# Altium PCB PCB1.PcbDoc
Units mil, origin at the board's own origin, x right, y up, seen from the top; angles counter-clockwise.
Board outline 3510 x 3510 mil, 2 copper layers (Top Layer, Bottom Layer); 36 components, 58 nets, 185 pads, 40 vias.
Unrouted connection lines stored in the file: 34.
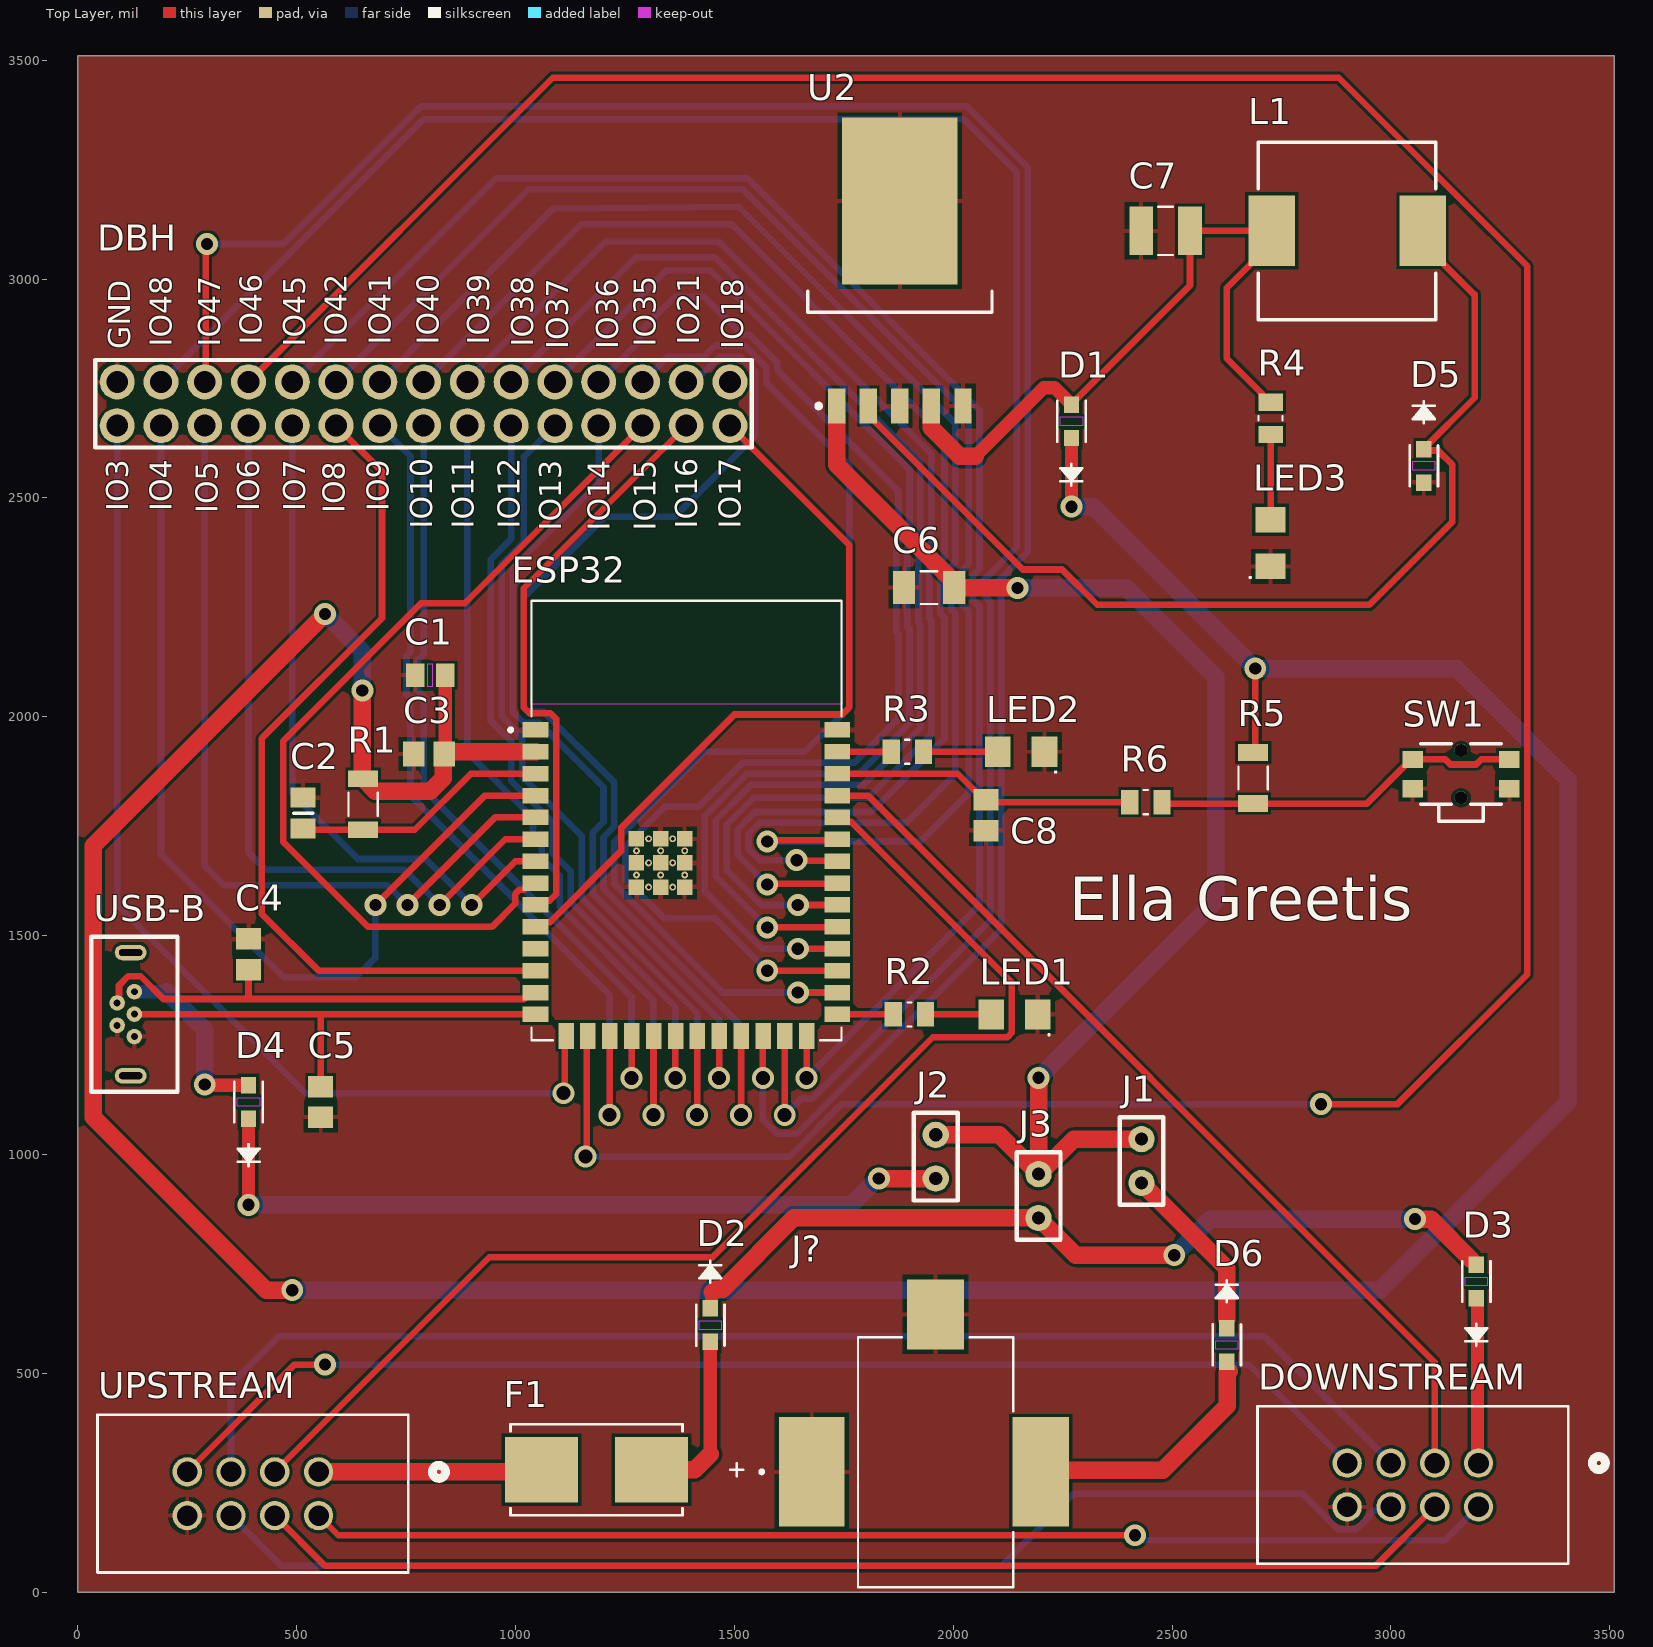
[diagram p0: Top Layer view]
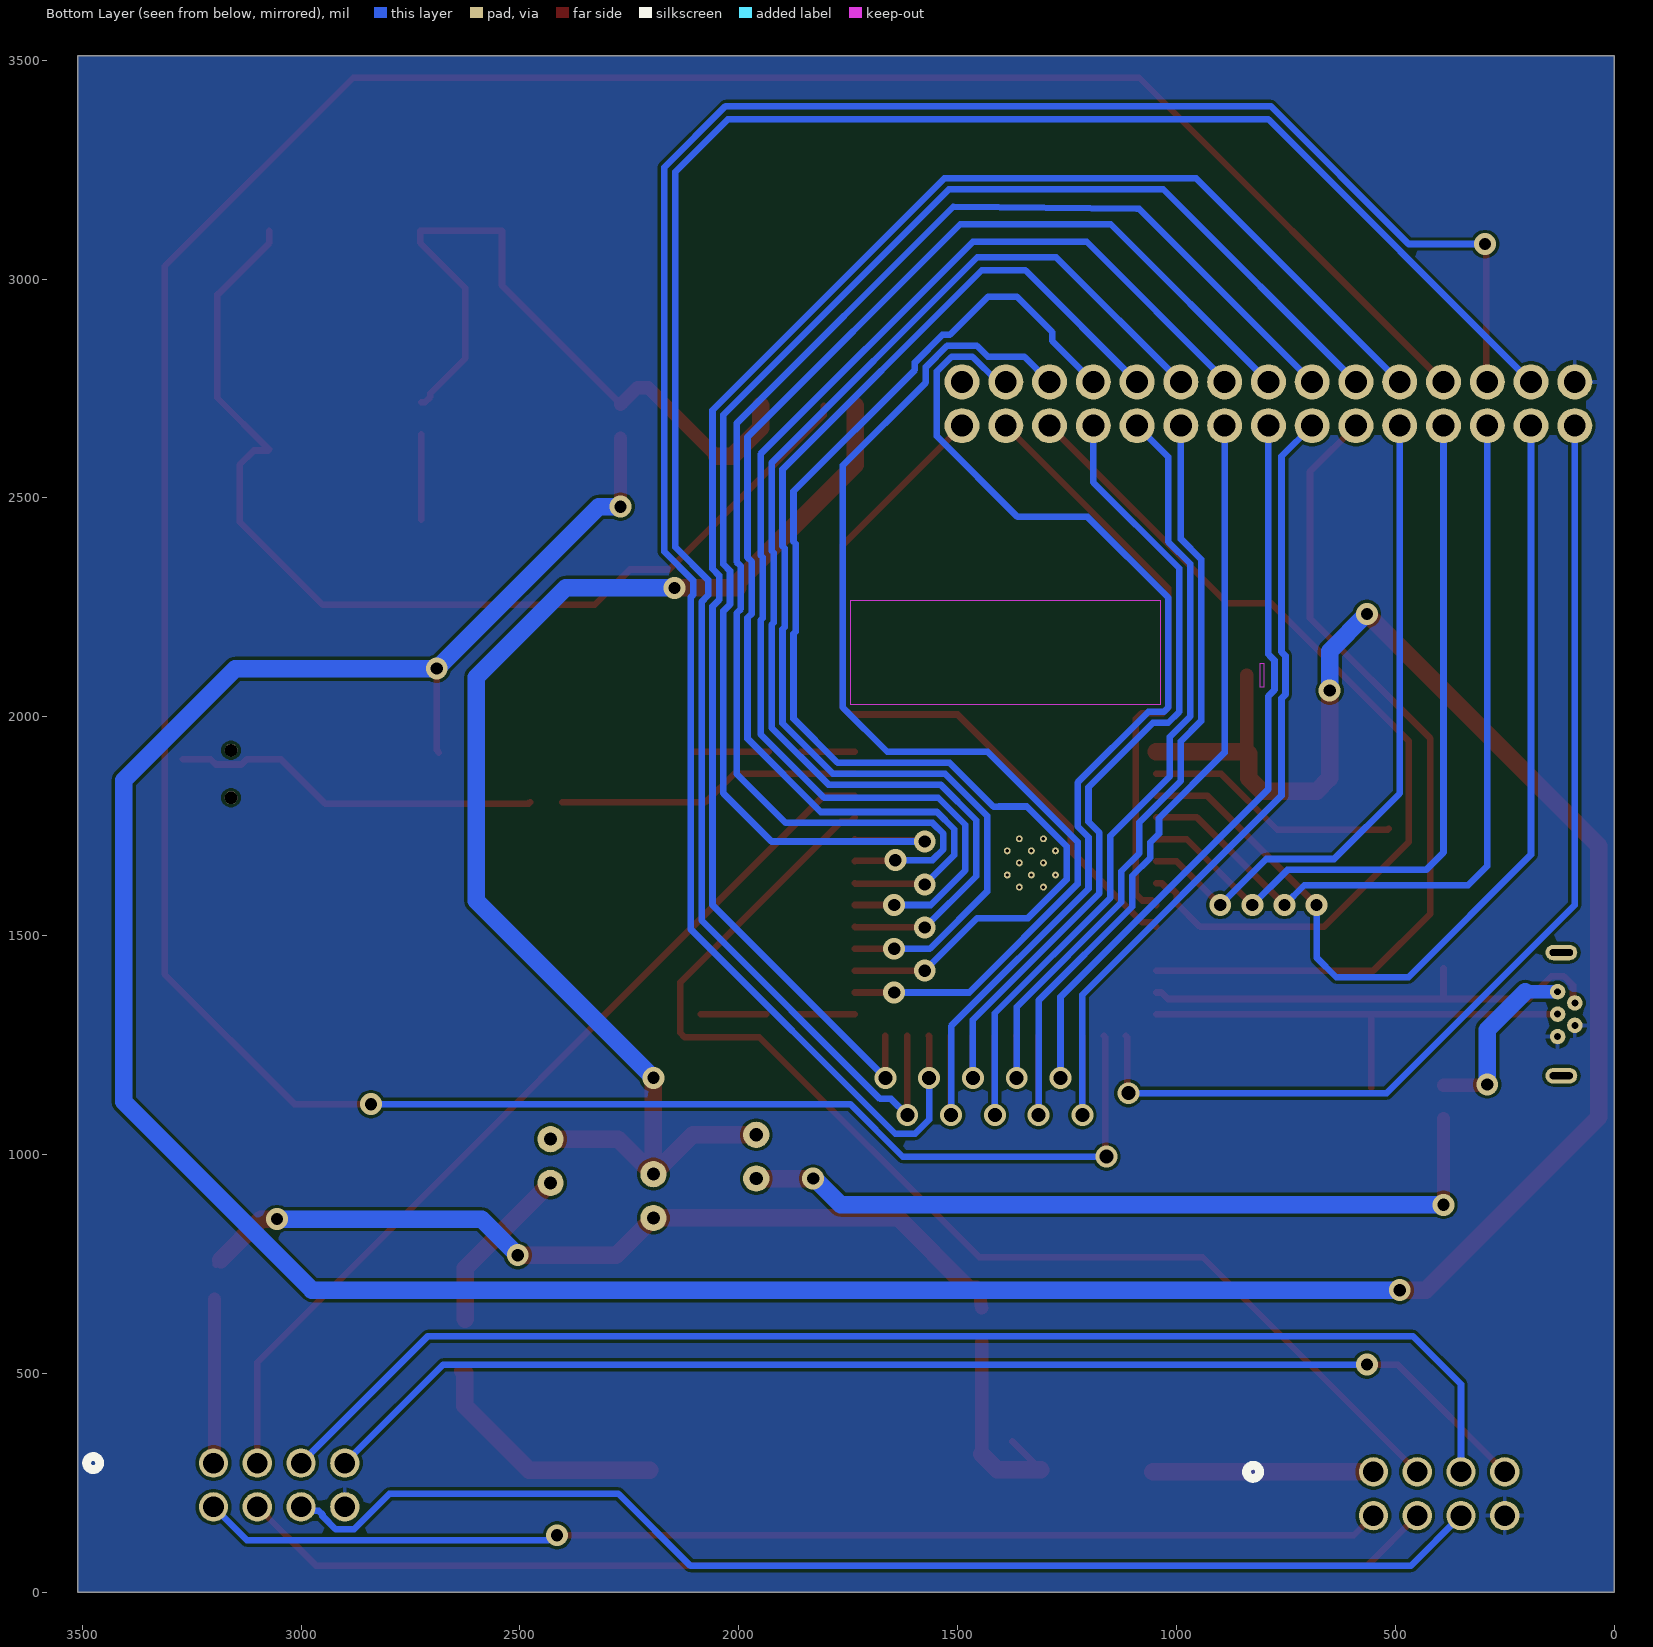
[diagram p1: Bottom Layer view, seen from below]

## Layer stack, top to bottom
Top Solder: solder mask 0.4, Solder Resist, Dk 3.5
Top Layer: signal copper 1.4
Dielectric 1: dielectric 12.6, FR-4, Dk 4.8
Bottom Layer: signal copper 1.4
Bottom Solder: solder mask 0.4, Solder Resist, Dk 3.5

## Board outline
0,0 0,3510 3510,3510 3510,0

## Design rules (kind name [scope] priority, off if disabled: settings)
Clearance [All] p1: gap=7 ignorepadtopadclearanceinfootprint=FALSE
ComponentClearance [All] p1: gap=7 collisioncheckmode=3 verticalgap=10 showdistances=FALSE
DiffPairsRouting [All] p1: maxlimit=15 minlimit=10 mostfreqgap=15 toplayer_minwidth=15 toplayer_maxwidth=15 toplayer_prefwidth=15 bottomlayer_minwidth=15 bottomlayer_maxwidth=15 bottomlayer_prefwidth=15 maxuncoupledlength=500
HoleSize [All] p1: absolutevalues=TRUE maxlimit=100 minlimit=32 maxpercent=80.000 minpercent=20.000
PolygonConnect [All] p1: connectstyle=Relief reliefconductorwidth=10 reliefentries=4 polygonreliefangle="90 Angle" airgapwidth=10
RoutingVias [All] p1: holewidth=35 width=57 viastyle="Through Hole" minholewidth=32 minwidth=54 maxholewidth=79 maxwidth=101
SilkToSolderMaskClearance [IsPad] p1: minsilkscreentomaskgap=8 clearancetoexposedcopper=TRUE
SolderMaskExpansion [All] p1: expansion=4 istentingtop=FALSE
SupplyNets "Schematic Supply Nets" [InNet('GND')] p1: voltage=0.000
Width [All] p1: maxlimit=50 minlimit=15 preferedwidth=15 minimp=50.000000 maximp=50.000000 favimp=50.000000
26 further rules are at their usual default settings.

## Classes and differential pairs
differential pair D: +D_P -D_N

## Components (designator, comment, footprint, x,y, rotation, side; value= is the part's Value field where it differs from the comment)
C1 "CL21A226MAYNNNE" CAP_CL_21_SAM 805,2095 r0 top value="22 uF"
C2 "CL21B105KBFNNNE" CAPC2012X140N 515,1780 r90 top value="1 uF"
C3 "THISONE08053C104KAT2A" CAPC2012X06N 802.52,1915 r0 top value="0.1 uF"
C4 "THISONE08053C104KAT2A" CAPC2012X06N 390,1457.48 r90 top value="0.1 uF"
C5 "THISONE08053C104KAT2A" CAPC2012X06N 555,1120 r270 top value="0.1 uF"
C6 "GRM31CR61A107MEA8L" CAPC3216X190N 1945,2295 r0 top value="100 uF"
C7 "JMK325ABJ337MM-PE" CAPC3225X280N 2485,3110 r0 top value="330 uF"
C8 "THISONE08053C104KAT2A" CAPC2012X06N 2075,1775 r90 top value="0.1 uF"
D1 "SD0805S020S1R0" SD0805_AVX 2270,2675 r90 top
D2 "SD0805S020S1R0" SD0805_AVX 1445,610 r270 top
D3 "SD0805S020S1R0" SD0805_AVX 3195,710 r90 top
D4 "SD0805S020S1R0" SD0805_AVX 390,1120 r90 top
D5 "SD0805S020S1R0" SD0805_AVX 3075,2573.25 r270 top
D6 "SD0805S020S1R0" SD0805_AVX 2625,565 r270 top
DBH "26643001RP2" 26643001RP2-Footprint-1 1540,2615 r90 top
DOWNSTREAM "702460801" CONN_7024608xx_MOL 3200,295 r180 top
ESP32 "ESP32-S3-WROOM-1-N4" XCVR_ESP32-S3-WROOM-1-N4 1390.51,1762.91 r0 top
F1 "0154.630DR" 0154Series_LTF 1185,280 r180 top
J1 "2x1JUMPER" 26640201RP2-Footprint-1 2480,885 r90 top
J2 "2x1JUMPER" 26640201RP2-Footprint-1 2010,895 r90 top
J3 "2x1JUMPER" 26640201RP2-Footprint-1 2245,805 r90 top
J? "RASM722BKZ" SWITCHCRAFT_RASM722BKZ 1959.84,275 r0 top
L1 "NR10050T221M" INDP10198X50N 2900,3110 r0 top
LED1 "APTR3216-VFX" SODFL350X110-2N 2140,1320 r180 top
LED2 "APTR3216-VFX" SODFL350X110-2N 2155,1920 r180 top
LED3 "APTR3216-VFX" SODFL350X110-2N 2725,2396.85 r90 top
R1 "10K Ohms" RESC3116X65N 651.73,1800 r90 top
R2 "220 Ohms" RESC2012X65N 1900,1320 r0 top
R3 "220 Ohms" RESC2012X65N 1895,1920 r0 top
R4 "220 Ohms" RESC2012X65N 2725,2681.81 r90 top
R5 "10K Ohms" RESC3116X65N 2685,1860 r90 top
R6 "220 Ohms" RESC2012X65N 2440,1805 r180 top
SW1 "436331045822" 436331045822 3160,1869.13 r0 top
U2 "LM2575-3.3WU-TR" DPAK183P1580X460-6N 1877.95,3019.06 r90 top
UPSTREAM "702460801" CONN_7024608xx_MOL 550,275 r180 top
USB-B "USB3131-30-0230-A_1" USB3131-30-0230-A_1-Footprint-1 90,1320.59 r270 top

## Footprints (in the part's own frame and the unit in brackets; to place one, negate y for a bottom-side part, rotate by r counter-clockwise, add the part's x,y. Pads: shape width x height; smd on the part's side, far side on the other; paste and mask are expansions set on the pad)
0154Series_LTF [mil]
  rect 167x150 smd paste+0 mask+0: 1(-125.5,0) 2(125.5,0)
  silkscreen extent -336,-104 196,104, body extent -191,-99 191,99, height 152
26640201RP2-Footprint-1 [mil]
  round 60 hole 30: 1(150,50) 2(50,50)
  silkscreen extent 0,0 200,100
26643001RP2-Footprint-1 [mil]
  round 80 hole 50: 1(50,1450) 2(50,1350) 3(50,1250) 4(50,1150) 5(50,1050) 6(50,950) 7(50,850) 8(50,750) 9(50,650) 10(50,550) 11(50,450) 12(50,350) 13(50,250) 14(50,150) 15(50,50) 16(150,50) 17(150,150) 18(150,250) 19(150,350) 20(150,450) 21(150,550) 22(150,650) 23(150,750) 24(150,850) 25(150,950) 26(150,1050) 27(150,1150) 28(150,1250) 29(150,1350) 30(150,1450)
  silkscreen extent 0,0 200,1500
436331045822 [mm] "3.5x4.7 mm SMD side push"
  rect 1.2x1 smd: A1(-2.8,0.85) A2(2.8,0.85) B1(-2.8,-0.85) B2(2.8,-0.85)
  round 0.75 hole 0.75 unplated: MH1(0,1.375) MH2(0,-1.375)
  silkscreen extent -2.35,-2.75 2.35,1.75, body extent -3.2,-2.75 3.2,1.75, height 1.65
CAP_CL_21_SAM [mil]
  rect 42x53 smd paste+0 mask+0: 1(-34.5,0) 2(34.5,0)
  Keep-Out Layer region: -5,-26.5 -5,26.5 5,26.5 5,-26.5
  body extent -41,-26 41,26, height 53
CAPC2012X06N [mm] "Chip Capacitor, 2-Leads, Body 2.01x1.25mm, IPC Medium Density"
  rect 1.25x1.45 smd: 1(-0.889,0) 2(0.889,0)
  body extent -1.1,-0.72 1.11,0.72, height 0.6
CAPC2012X140N [mm]
  rect 1.15x1.45 smd: 1(-0.9,0) 2(0.9,0)
  silkscreen extent 0,-0.55 0,0.55
CAPC3216X190N [mm]
  rect 1.29x1.91 smd: 1(-1.46,0) 2(1.46,0)
  silkscreen extent -0.49,-0.95 0.49,0.95
CAPC3225X280N [mm]
  rect 1.37x2.81 smd: 1(-1.42,0) 2(1.42,0)
  silkscreen extent -0.42,-1.4 0.42,1.4
CONN_7024608xx_MOL [mil]
  round 67 / inner round 60 / far side round 67 hole 47 paste-99999 mask+0: 1(0,0) 2(100,0) 3(200,0) 4(300,0) 5(0,100) 6(100,100) 7(200,100) 8(300,100)
  silkscreen extent -290,-130 505,230
DPAK183P1580X460-6N [mm] "D2-PAK, 6-Pads, Body 7.68x8.69mm (max), IPC Medium Density"
  rect 2.05x1 smd: 1(-7.85,3.66) 2(-7.85,1.83) 3(-7.85,0) 4(-7.85,-1.83) 5(-7.85,-3.66)
  rect 9.7x6.7 smd: 6(4.05,0)
  silkscreen extent -7.97,-5.35 -1.2,5.35, body extent -2.4,-5.33 6.77,5.33, height 4.6
INDP10198X50N [mm] "Precision Wire Wound Inductor, 2-Leads, Body 10.14x9.80mm, IPC Medium Density"
  rect 2.7x4.1 smd: 1(-4.375,0) 2(4.375,0)
  silkscreen extent -5.15,-5.15 5.15,5.15, body extent -5.15,-5.15 5.15,5.15, height 5
RESC2012X65N [mm]
  rect 1x1.42 smd: 1(-0.935,0) 2(0.935,0)
  silkscreen extent -0.12,-0.7 0.12,0.7
RESC3116X65N [mm]
  rect 0.97x1.73 smd: 1(-1.48,0) 2(1.48,0)
  silkscreen extent -0.67,-0.85 0.67,0.85, body extent -1.55,-0.8 1.55,0.8, height 0.65
SD0805_AVX [mil]
  rect 37.5x35 smd paste+0 mask+0: 1(-38.25,0) 2(38.25,0)
  Top Layer keep-out region: -10,-25.5 -10,25.5 10,25.5 10,-25.5
  silkscreen extent -147,-32 46,32, body extent -41,-28 41,28, height 39
SODFL350X110-2N [mm] "SODFL, 2-Leads, Body 1.60x3.50mm, IPC Medium Density"
  rect 1.5x1.75 smd: 1(-1.35,0) 2(1.35,0)
  silkscreen extent -2.05,1.13 -1.95,1.22, body extent -0.7,-0.8 0.7,0.8, height 1.1
SWITCHCRAFT_RASM722BKZ [mm]
  rect 3.81x6.35 smd: 1(-7.19,0)
  rect 3.3x4.06 smd: 2(0,9.14)
  rect 3.3x6.35 smd: 3(6.1,0)
  silkscreen extent -10.19,-6.7 4.5,7.81
USB3131-30-0230-A_1-Footprint-1 [mm]
  round 0.9 hole 0.4: 1(-1.3,1) 2(-0.65,0) 3(0,1) 4(0.65,0) 5(1.3,1)
  oval 0.9x1.85 hole 0.4 slot 1.35 at 90 deg: 6(-3.575,0.78) 7(3.575,0.78)
  silkscreen extent -4.5,-1.5 4.5,3.5
XCVR_ESP32-S3-WROOM-1-N4 [mm]
  rect 1.5x0.9 smd: 1(-8.75,5.26) 2(-8.75,3.99) 3(-8.75,2.72) 4(-8.75,1.45) 5(-8.75,0.18) 6(-8.75,-1.09) 7(-8.75,-2.36) 8(-8.75,-3.63) 9(-8.75,-4.9) 10(-8.75,-6.17) 11(-8.75,-7.44) 12(-8.75,-8.71) 13(-8.75,-9.98) 14(-8.75,-11.25) 27(8.75,-11.25) 28(8.75,-9.98) 29(8.75,-8.71) 30(8.75,-7.44) 31(8.75,-6.17) 32(8.75,-4.9) 33(8.75,-3.63) 34(8.75,-2.36) 35(8.75,-1.09) 36(8.75,0.18) 37(8.75,1.45) 38(8.75,2.72) 39(8.75,3.99) 40(8.75,5.26)
  rect 0.9x1.5 smd: 15(-6.985,-12.5) 16(-5.715,-12.5) 17(-4.445,-12.5) 18(-3.175,-12.5) 19(-1.905,-12.5) 20(-0.635,-12.5) 21(0.635,-12.5) 22(1.905,-12.5) 23(3.175,-12.5) 24(4.445,-12.5) 25(5.715,-12.5) 26(6.985,-12.5)
  rect 0.9x0.9 smd: 41_1(-1.5,-2.46) 41_2(-2.9,-2.46) 41_3(-0.1,-2.46) 41_4(-2.9,-3.86) 41_5(-1.5,-3.86) 41_6(-0.1,-3.86) 41_7(-2.9,-1.06) 41_8(-1.5,-1.06) 41_9(-0.1,-1.06)
  round 0.4 hole 0.2 mask+0: 41_10(-1.5,-1.76) 41_11(-2.9,-1.76) 41_12(-0.1,-1.76) 41_13(-2.9,-3.16) 41_14(-1.5,-3.16) 41_15(-0.1,-3.16) 41_16(-2.2,-1.06) 41_17(-0.8,-1.06) 41_18(-2.2,-2.46) 41_19(-0.8,-2.46) 41_20(-2.2,-3.86) 41_21(-0.8,-3.86)
  Keep-Out Layer region: 9,6.75 -9,6.75 -9,12.75 9,12.75
  Keep-Out Layer region: 9,6.75 -9,6.75 -9,12.75 9,12.75
  silkscreen extent -10.3,-12.75 9,12.75

## Part data
C1: library part CMP-017-000005-2, "No Description Available", Mfr_Name=Samsung, Component Type=Standard, Design Item ID=CL21A226MAYNNNE, Pin Count=2, Source=CL21A226MAYNNNE.SchLib
C2: library part CMP-017-000007-1, "1ÂµF Â±10% 50V Ceramic Capacitor X7R 0805 _2012 Metric_", Package="0805 Samsung", Availability=Unavailable, Component Type=Standard, Design Item ID=CL21B105KBFNNNE, MF=Samsung, MP=CL21B105KBFNNNE, Pin Count=2, Price=None, SnapEDA_Link=https://www.snapeda.com/parts/CL21B105KBFNNNE/Samsung/view-part/3598744/?ref=snap, Source=SnapEDAsch.SchLib
C3 C4 C5 C8: library part CMP-017-000003-3, "No Description Available", Mfr_Name="KYOCERA AVX", Component Type=Standard, Design Item ID=08053C104KAT2A, Pin Count=2, Source=08053C104KAT2A.SchLib
C6: library part CMP-017-000006-1, Package=None, Availability=Unavailable, Component Type=Standard, Design Item ID=GRM31CR61A107MEA8L, MP=GRM31CR61A107MEA8L, Pin Count=2, Price=None, Source=GRM31CR61A107MEA8L.SchLib
C7: library part CMP-017-000008-1, "330ÂµF Â±20% 6.3V Ceramic Capacitor X5R 1210 (3225 Metric)", Package="3225 Taiyo Yuden", Component Type=Standard, Design Item ID=JMK325ABJ337MM-PE, Digi-Key_Part_Number=587-6443-1-ND, MF="Taiyo Yuden", Mouser-Purchase-URL=https://snapeda.com/shop?store=Mouser&id=3658173, MP=JMK325ABJ337MM-PE, Pin Count=2, SnapEDA_Link=https://www.snapeda.com/parts/JMK325ABJ337MM-PE/Taiyo%20Yuden/view-part/3658173/?ref=snap, Source=JMK325ABJ337MM-PE.SchLib
D1 D2 D3 D4 D5 D6: library part CMP-024-000001-3, "No Description Available", Mfr_Name="KYOCERA AVX", Design Item ID=SD0805S020S1R0, Source=SD0805S020S1R0.SchLib
DBH: library part CMP-00006-3, "Board Connector"
DOWNSTREAM UPSTREAM: library part CMP-004-000000-1, "No Description Available", Mfr_Name="Molex Connector Corporation", Component Type=Standard, Design Item ID=702460801, Pin Count=8, RefDes=RefDes, Source=702460801.SchLib, Type=Type
ESP32: library part CMP-006-000000-1, Package=None, Availability=Unavailable, Component Type=Standard, Design Item ID=ESP32-S3-WROOM-1-N4, MF="{'manufacturer': u'Espressif Systems'}", MP=ESP32-S3-WROOM-1-N4, Pin Count=49, Price=None, Source=ESP32-S3-WROOM-1-N4.SchLib
F1: library part CMP-010-000000-2, "No Description Available", Mfr_Name="Littelfuse Inc", Component Type=Standard, Design Item ID=0154.630DR, Pin Count=2, Source=0154P630DR.SchLib
J1 J2 J3: library part CMP-00005-3, "Board Connector"
J?: library part CMP-020-000000-1, Package=None, Availability=Unavailable, Component Type=Standard, Design Item ID=RASM722BKZ, MF="Switchcraft Inc.", MP=RASM722BKZ, Pin Count=3, Price=None, Source=RASM722BKZ.SchLib
L1: library part CMP-028-000000-2, "No Description Available", Mfr_Name="Taiyo Yuden", Component Type=Standard, Design Item ID=NR10050T221M, Pin Count=2, Source=NR10050T221M.SchLib
LED1 LED2 LED3: library part CMP-00009-1, "violet LED"
R1 R5: library part CMP-017-000000-1, "10 kOhms Â±1% 0.25W, 1/4W Chip Resistor 1206 (3216 Metric) Moisture Resistant Thick Film", Package="3116 Yageo", Availability="In Stock", Check_prices=https://www.snapeda.com/parts/RC1206FR-0710KL/Yageo/view-part/?ref=eda, Component Type=Standard, Design Item ID=RC1206FR-0710KL, MF=Yageo, MP=RC1206FR-0710KL, Pin Count=2, Price=None, Purchase-URL=https://pricing.snapeda.com/search?q=RC1206FR-0710KL&ref=eda, SnapEDA_Link=https://www.snapeda.com/parts/RC1206FR-0710KL/Yageo/view-part/?ref=snap, Source=RC1206FR-0710KL.SchLib
R2 R3 R4 R6: library part CMP-017-000002-1, "Fixed Resistor CRGCQ 0805 220R 1%", Package="2012 TE Connectivity", Component Type=Standard, Design Item ID=CRGCQ0805F220R, Digi-Key_Part_Number=A129741CT-ND, DigiKey-Purchase-URL=https://snapeda.com/shop?store=DigiKey&id=3188284, MF="TE Connectivity", Mouser-Purchase-URL=https://snapeda.com/shop?store=Mouser&id=3188284, MP=CRGCQ0805F220R, Pin Count=2, SnapEDA_Link=https://www.snapeda.com/parts/CRGCQ0805F220R/TE%20Connectivity%20Passive%20Product/view-part/3188284/?ref=snap, Source=CRGCQ0805F220R.SchLib
SW1: library part CMP-015-000006-1, "WS-TASU SMT Tact Switch with Boss Design 4.7x3.5mm side push, SPST-NO, 12VDC, 50mA, 220g", Manufacturer="Wurth Elektronik", Operating Temperature Max=85°C, Operating Temperature Min=-40°C, Rated Current=50mA, Rated Voltage=12VDC, Category="Tact Switches", Circuit=SPST-NO, Component Type=Standard, ComponentLink1Description="Website Link", ComponentLink1URL=https://www.we-online.com/redexpert/article/436331045822?ad, ComponentLink2Description="Datasheet Link", ComponentLink2URL=https://www.we-online.com/redexpert/spec/436331045822?ad, Contact Material="Stainless Steel", Contact Plating=Silver, Design Item ID=436331045822, Height=1.65mm, Length=4.7mm, Manufacturer Part Number=436331045822, Match Code=WS-TASU, Mount="Surface Mount", Operation Force=220g, Packaging="Tape and Reel", Pin Count=4, Source=WS-TASU.SchLib, Terminal Material="Copper Alloy", Terminal Plating=Silver, Washable=No, Width=3.5mm
U2: library part CMP-013-000001-2, "No Description Available", Mfr_Name=Microchip, Component Type=Standard, Design Item ID=LM2575-3.3WU-TR, Pin Count=6, RefDes=RefDes, Source=LM2575-3P3WU-TR.SchLib, Type=Type
USB-B: library part CMP-008-000002-2, "No Description Available", Mfr_Name="Global Connector Technology", Component Type=Standard, Design Item ID=USB3131-30-0230-A_1, Pin Count=5, RefDes=RefDes, Source=USB3131-30-0230-A.SchLib, Type=Type

## Via types
v1: diameter 50, hole 28, Top Layer to Bottom Layer, 28 vias
v2: diameter 50, hole 32, Top Layer to Bottom Layer, 12 vias

## Nets (pads, with @x,y where several pads share a name; then routed paths per layer and width w, separated by ;. In a path a pad name is that pad's centre, name@x,y a point inside that pad or via, vN(x,y) a via of type N, cw(c..) or ccw(c..) an arc to the next point about the centre after c; other vN are vias at no path point)
5TO12IN: C6.2 J1.1 J2.1 J3.1 U2.1 | length 3052.7
  Top Layer w15: C6.2 C6.2@2002.48,2307.2 ; v1@2145.79,2295 v1(2146.82,2293.97)
  Top Layer w40: U2.1 1733.86,2575.83 C6.2@2002.48,2307.2 ; J2.1 2105,1045 J3.1 ; C6.2 v1@2145.79,2295 ; v1(2195,1175) J3.1 ; J1.1 2275,1035 J3.1
  Bottom Layer w15: v1(2146.82,2293.97) v1@2147.86,2295
  Bottom Layer w40: v1@2147.86,2295 2395,2295 2600,2090 2600,1580 v1(2195,1175)
D_N: C4.1 ESP32.13 USB-B.2 | length 1099.7
  Top Layer w15: USB-B.2 93.91,1350.09 93.91,1364.54 94.15,1364.78 94.15,1386.36 114.78,1406.99 143.96,1406.99 195.73,1355.22 390,1355.22 ; C4.1@390,1425 390,1355.22 ; ESP32.13 1034.21,1370 1019.43,1355.22 550,1355.22 390,1355.22
D_P: C5.1 ESP32.14 USB-B.3 | length 1086.8
  Top Layer w15: USB-B.3 129.67,1320.3 550,1320.3 ; C5.1@555,1152.48 555,1315.3 550,1320.3 ; ESP32.14 1045.73,1320.3 550,1320.3
DCB_VIN: D6.1 J1.2 | length 396.1
  Top Layer w15: J1.2 J1.2@2432.5,932.5
  Top Layer w40: J1.2 2625,740 2625,623.25
GND: C1.1 C2.2 C3.1 C4.2 C5.2 C6.1 C7.1 C8.1 D5.2 DBH.30 DOWNSTREAM.8 ESP32.1 ESP32.40 ESP32.41_1 ESP32.41_2 ESP32.41_3 ESP32.41_4 ESP32.41_5 ESP32.41_6 ESP32.41_7 ESP32.41_8 ESP32.41_9 J?.1 J?.2 LED1.1 LED2.1 LED3.1 SW1.B1 SW1.B2 U2.3 U2.5 U2.6 UPSTREAM.8 USB-B.4 USB-B.5
HEADER_VIN: D2.1 D3.2 J3.2 | length 1965.8
  Top Layer w15: D2.1 D2.1@1445,649.5 ; J3.2 J3.2@2197.5,852.5 ; v1(3055,852.5) v1@3055.71,851.79 ; D3.2@3183.75,759.5 3185,759.5 3195,749.5 D3.2
  Top Layer w30: D2.1@1445,649.5 1450,685
  Top Layer w40: 1450,685 1457.5,692.5 1473,692.5 1635.5,855 J3.2 ; J3.2@2197.5,852.5 2280,770 v1(2505,770) ; v1@3055.71,851.79 3091.46,851.79 D3.2@3183.75,759.5
  Bottom Layer w40: v1(2505,770) 2587.5,852.5 v1(3055,852.5)
HP3: DOWNSTREAM.3 UPSTREAM.3 | length 3015.7
  Bottom Layer w15: UPSTREAM.3 350,475 460,585 2710,585 DOWNSTREAM.3
HP4: DOWNSTREAM.4 UPSTREAM.4 | length 2844.7
  Top Layer w15: UPSTREAM.4 495,520 v1(565,520)
  Bottom Layer w15: v1(565,520) 2675,520 DOWNSTREAM.4
HP5: DOWNSTREAM.5 UPSTREAM.5 | length 2704.7
  Top Layer w15: UPSTREAM.5 595,130 v1(2415,130)
  Bottom Layer w15: v1(2415,130) 2424.47,130 2435.47,119 3124,119 DOWNSTREAM.5
HP6: DOWNSTREAM.6 UPSTREAM.6 | length 2753.6
  Top Layer w15: UPSTREAM.6 565,60 2965,60 DOWNSTREAM.6
HP7: DOWNSTREAM.7 UPSTREAM.7 | length 2822.6
  Bottom Layer w15: UPSTREAM.7 465,60 2110,60 2275,225 2797.88,225 2878.88,144 2921.12,144 2951,173.88 2951,177.23 2959.79,186.02 2991.02,186.02 DOWNSTREAM.7
IO0: ESP32.27 R2.1 | length 128.2
  Top Layer w15: ESP32.27 R2.1
IO1: ESP32.39 R3.1 | length 123.2
  Top Layer w15: ESP32.39 R3.1
IO2: C8.2 ESP32.38 R6.2 | length 695.1
  Top Layer w15: ESP32.38 2010.51,1870 2073.03,1807.48 2075,1807.48 2077.48,1805 R6.2
IO3: DBH.1 ESP32.15 | length 2426.2
  Top Layer w15: v2(1110,1140) 1112.76,1142.76 1112.76,1268.03 ESP32.15
  Bottom Layer w15: DBH.1 90,1570 520,1140 v2(1110,1140)
IO4: DBH.2 ESP32.4 | length 2194.2
  Top Layer w15: v1(680,1570) 930,1820 ESP32.4
  Bottom Layer w15: DBH.2 190,1685 470,1405 635,1405 680,1450 v1(680,1570)
IO5: DBH.3 ESP32.5 | length 1881.9
  Top Layer w15: v1(753.33,1570) 953.33,1770 ESP32.5
  Bottom Layer w15: DBH.3 290,1658.79 333.79,1615 708.33,1615 v1(753.33,1570)
IO6: DBH.4 ESP32.6 | length 1742.9
  Top Layer w15: v1(826.67,1570) 976.67,1720 ESP32.6
  Bottom Layer w15: DBH.4 390,1690 430,1650 746.67,1650 v1(826.67,1570)
IO7: DBH.5 ESP32.7 | length 1543.1
  Top Layer w15: v1(900,1570) 1000,1670 ESP32.7
  Bottom Layer w15: DBH.5 490,1825 640,1675 795,1675 v1(900,1570)
IO8: DBH.6 ESP32.12 | length 1952.3
  Top Layer w15: DBH.6 695,2560 695,2225 420,1950 420,1550 550,1420 ESP32.12
IO9: DBH.7 ESP32.17 | length 1980.9
  Top Layer w15: v2(1215,1090) 1215.26,1090.26 1215.26,1270.53 ESP32.17
  Bottom Layer w15: DBH.7 760,2595 760,2148.1 751,2139.1 751,2050.9 760,2041.9 760,1820 1215,1365 v2(1215,1090)
IO10: DBH.8 ESP32.18 | length 1794.3
  Top Layer w15: v2(1265,1175) 1265.26,1175.26 1265.26,1270.53 ESP32.18
  Bottom Layer w15: DBH.8 790,2142.75 785,2137.75 776,2128.75 776,2061.25 785,2052.25 790,2047.25 790,1835 1265,1360 v2(1265,1175)
IO11: DBH.9 ESP32.19 | length 1932
  Top Layer w15: v2(1315,1090) 1315.26,1090.26 1315.26,1270.53 ESP32.19
  Bottom Layer w15: DBH.9 890,1918.25 1040,1768.25 1040,1732.89 1060,1712.89 1060,1677.54 1100.96,1636.57 1100.96,1565.86 1315,1351.83 v2(1315,1090)
IO12: DBH.10 ESP32.20 | length 1779.7
  Top Layer w15: v2(1365,1175) 1365.26,1175.26 1365.26,1270.53 ESP32.20
  Bottom Layer w15: DBH.10 990,2406.07 943.68,2359.75 943.68,1990.35 990,1944.03 990,1853.6 1085,1758.6 1085,1687.89 1125.96,1646.93 1125.96,1576.22 1365,1337.18 v2(1365,1175)
IO13: DBH.11 ESP32.21 | length 1991.1
  Top Layer w15: v2(1415,1090) 1415.26,1090.26 1415.26,1270.53 ESP32.21
  Bottom Layer w15: DBH.11 1018.68,2593.68 1018.68,2399.39 968.68,2349.39 968.68,2000.7 1015,1954.38 1015,1863.96 1150.96,1727.99 1150.96,1586.57 1415,1322.54 v2(1415,1090)
IO14: DBH.12 ESP32.22 | length 1904
  Top Layer w15: v2(1465,1175) 1465.26,1175.26 1465.26,1270.53 ESP32.22
  Bottom Layer w15: DBH.12 1190,2535.36 993.68,2339.04 993.68,2011.06 1018.58,1986.16 1053.93,1986.16 1200.96,1839.13 1200.96,1760.2 1175.96,1735.2 1175.96,1596.93 1465,1307.89 v2(1465,1175)
IO15: DBH.13 ESP32.8 | length 2061
  Top Layer w15: ESP32.8 1034.21,1620 1019.43,1605.22 1009.25,1605.22 999,1594.97 999,1572.97 946.02,1520 663.64,1520 468.96,1714.68 468.96,1943.96 784.13,2259.13 884.13,2259.13 DBH.13
IO16: DBH.14 ESP32.9 | length 1340
  Top Layer w15: ESP32.9 1056.24,1580.22 1078.23,1580.22 1093.05,1595.03 1093.05,1994.96 1079.83,2008.19 1031.9,2008.19 1018.68,2021.41 1018.68,2293.68 DBH.14
IO17: DBH.15 ESP32.10 | length 1711.5
  Top Layer w15: ESP32.10 1056.24,1530.22 1078.23,1530.22 1241.12,1693.11 1241.12,1746.15 1500.19,2005.22 1746.15,2005.22 1762.34,2021.41 1762.34,2392.66 DBH.15
IO21: DBH.17 ESP32.23 | length 2634.7
  Top Layer w15: v2(1515,1090) 1515.26,1090.26 1515.26,1270.53 ESP32.23
  Bottom Layer w15: DBH.17 1407.59,2765 1440.09,2797.5 1441.18,2797.5 1466.18,2822.5 1513.82,2822.5 1547.5,2788.82 1547.5,2641.18 1362.97,2456.66 1203.21,2456.66 1018.68,2272.13 1018.68,2021.41 1028.93,2011.16 1064.29,2011.16 1225.96,1849.48 1225.96,1749.84 1200.96,1724.84 1200.96,1607.28 1515,1293.25 v2(1515,1090)
IO35: DBH.18 ESP32.28 | length 2565.1
  Top Layer w15: v1(1645,1370) ESP32.28
  Bottom Layer w15: DBH.18 1347.5,2822.5 1430.83,2822.5 1455.83,2847.5 1524.17,2847.5 1572.5,2799.17 1572.5,2763.82 1762.34,2573.97 1762.34,2021.41 1660.93,1920 1431.48,1920 1225.96,1714.49 1225.96,1617.64 1473.6,1370 v1(1645,1370)
IO36: DBH.19 ESP32.29 | length 2886.7
  Top Layer w15: v1(1575,1420) ESP32.29
  Bottom Layer w15: DBH.19 1283.72,2858.72 1283.72,2878.72 1365,2960 1430,2960 1517.5,2872.5 1534.53,2872.5 1597.5,2809.53 1597.5,2792.5 1875,2515 1875,2400.45 1870,2395.45 1870,2194.55 1875,2189.55 1875,1995.71 1774.29,1895 1518.22,1895 1417.82,1794.6 1405.4,1794.6 1405,1795 1341.83,1795 1250.96,1704.13 1250.96,1627.99 1338.96,1540 1455,1540 v1(1575,1420)
IO37: DBH.20 ESP32.30 | length 2772.8
  Top Layer w15: v1(1645,1470) ESP32.30
  Bottom Layer w15: DBH.20 1345,3020 1445,3020 1900,2565 1900,2390.09 1895,2385.09 1895,2204.91 1900,2199.91 1900,1985.36 1784.64,1870 1528.58,1870 1432.55,1773.97 1432.55,1600.68 1563.23,1470 v1(1645,1470)
IO38: DBH.21 ESP32.31 | length 2866.5
  Top Layer w15: v1(1575,1518.33) 1575.83,1519.17 1734.17,1519.17 ESP32.31
  Bottom Layer w15: DBH.21 1275,3050 1455,3050 1925,2580 1925,2379.74 1920,2374.74 1920,2215.26 1925,2210.26 1925,1975 1795,1845 1538.93,1845 1457.55,1763.62 1457.55,1635.78 v1(1575,1518.33)
IO39: DBH.22 ESP32.32 | length 2983
  Top Layer w15: v1(1645,1570) ESP32.32
  Bottom Layer w15: DBH.22 890,2770 1205,3085 1465,3085 1950,2600 1950,2369.38 1945,2364.38 1945,2225.62 1950,2220.62 1950,1960 1805,1815 1544.29,1815 1482.55,1753.26 1482.55,1649.01 1561.56,1570 v1(1645,1570)
IO40: DBH.23 ESP32.33 | length 3111.5
  Top Layer w15: v1(1575,1616.67) 1576.67,1618.33 1733.33,1618.33 ESP32.33
  Bottom Layer w15: DBH.23 1150,3125 1494.06,3125 1980,2639.06 1980,2364.03 1970,2354.03 1970,2235.97 1980,2225.97 1980,1950 1812.45,1782.45 1547.09,1782.45 1507.55,1742.91 1507.55,1684.11 v1(1575,1616.67)
IO41: DBH.24 ESP32.34 | length 3270.3
  Top Layer w15: v1(1642.34,1672.45) 1643.57,1671.22 1733.78,1671.22 ESP32.34
  Bottom Layer w15: DBH.24 1080,3155 1085,3160 1091.12,3160.13 1510,3165 2005,2670 2005,2353.67 1995,2343.67 1995,2246.33 2005,2236.33 2005,1870 1892.45,1757.45 1557.45,1757.45 1532.55,1732.55 1532.55,1697.34 1557.45,1672.45 v1(1642.34,1672.45)
IO42: DBH.25 ESP32.35 | length 3385.6
  Top Layer w15: v1(1575.05,1714.95) 1577.6,1717.5 1732.5,1717.5 ESP32.35
  Bottom Layer w15: DBH.25 1030,3205 1520,3205 2035,2690 2035,2348.31 2020,2333.31 2020,2256.69 2035,2241.69 2035,1825 1924.95,1714.95 v1(1575.05,1714.95)
IO45: DBH.26 ESP32.26 | length 3779.4
  Top Layer w15: v2(1665,1175) 1665.26,1175.26 1665.26,1270.53 ESP32.26
  Bottom Layer w15: DBH.26 955,3230 1530.36,3230 2060,2700.36 2060,2337.96 2045,2322.96 2045,2267.04 2060,2252.04 2060,1570 v2(1665,1175)
IO46: DBH.27 ESP32.16 | length 7607.6
  Top Layer w15: DBH.27 1085,3460 2880.85,3460 3311.36,3029.49 3311.36,1411.36 3015,1115 v1(2840,1115) ; v2(1160,995) 1162.76,997.76 1162.76,1268.03 ESP32.16
  Bottom Layer w15: v2(1160,995) 1625.36,995 1745.36,1115 v1(2840,1115)
IO47: DBH.28 ESP32.24 | length 5093.3
  Top Layer w15: DBH.28 292.5,2767.5 292.5,3077.5 v1(295,3080) ; v2(1565,1175) 1565.26,1175.26 1565.26,1270.53 ESP32.24
  Bottom Layer w15: v1(295,3080) 469.64,3080 784.64,3395 2030,3395 2170,3255 2170,2377.25 2104.32,2311.57 2104.32,2278.43 2110,2272.75 2110,1515 1642.5,1047.5 1597.4,1047.5 1565,1079.9 v2(1565,1175)
IO48: DBH.29 ESP32.25 | length 4835.7
  Top Layer w15: v2(1615,1090) 1615.26,1090.26 1615.26,1270.53 ESP32.25
  Bottom Layer w15: DBH.29 790,3365 2024.64,3365 2145,3244.64 2145,2387.6 2070,2312.6 2070,2277.4 2085,2262.4 2085,1534.9 1677.15,1127.05 1652.05,1127.05 v2(1615,1090)
NetC2_1: C2.1 ESP32.3 R1.1 | length 585.3
  Top Layer w15: C2.1 517.83,1741.73 R1.1 769.77,1741.73 898.03,1870 ESP32.3
NetC7_2: C7.2 D1.2 L1.1 R4.2 U2.4 | length 1654.5
  Top Layer w15: D1.2 2270,2714.5 2540.91,2985.41 C7.2 L1.1 2727.76,3082.44 2625,2979.68 2625,2818.62 2704.55,2739.07 2704.55,2730.81 2716.73,2718.62 R4.2
  Top Layer w30: 2050,2595 2206.7,2751.7 2231.55,2751.7 2266.25,2717 2267.5,2717 2270,2714.5 D1.2
  Top Layer w40: U2.4 1950,2660 2015,2595 2050,2595
NetD2_2: D2.2 F1.1 | length 496.6
  Top Layer w15: F1.1 F1.1@1374.75,344.25
  Top Layer w30: 1445,315 D2.2
  Top Layer w40: F1.1 1410,280 1445,315
NetD3_1: D3.1 DOWNSTREAM.1 | length 378.8
  Top Layer w15: D3.1 D3.1@3197.5,669.25 ; DOWNSTREAM.1@3197.5,297.5 DOWNSTREAM.1
  Top Layer w30: DOWNSTREAM.1@3197.5,297.5 D3.1@3197.5,669.25
NetD4_2: D4.2 USB-B.1 | length 422.3
  Top Layer w15: v1(290,1160) v1@291.75,1158.25
  Top Layer w30: v1@291.75,1158.25 D4.2
  Bottom Layer w30: USB-B.1 203.23,1371.77
  Bottom Layer w40: 203.23,1371.77 290,1285 v1(290,1160)
NetD5_1: D5.1 L1.2 U2.2 | length 2423.4
  Top Layer w15: U2.2 1805.91,2689.33 2158.77,2336.47 2248.53,2336.47 2329.11,2255.89 2950.89,2255.89 3140,2445 3140,2576 3107.75,2608.25 3075.5,2608.25 3073,2610.75 3191.21,2728.96 3191.21,2965 3189.68,2965 3072.24,3082.44 L1.2
NetD6_2: D6.2 J?.3 | length 569.2
  Top Layer w15: J?.3 J?.3@2203.12,278.12
  Top Layer w40: J?.3@2203.12,278.12 2478.12,278.12 2626.09,426.09 2626.09,501.09 2630,505
NetF1_2: F1.2 UPSTREAM.1 | length 511.6
  Top Layer w15: F1.2@1054.5,275 F1.2
  Top Layer w40: UPSTREAM.1 F1.2@1054.5,275
NetLED1_2: LED1.2 R2.2 | length 150
  Top Layer w15: R2.2 LED1.2
NetLED2_2: LED2.2 R3.2 | length 170
  Top Layer w15: R3.2 LED2.2
NetLED3_2: LED3.2 R4.1 | length 195
  Top Layer w15: LED3.2 R4.1
NetR5_1: R5.1 R6.1 SW1.A1 SW1.A2 | length 846.2
  Top Layer w15: R6.1 2480.08,1801.73 R5.1 2944.96,1801.73 3045.83,1902.6 3124.43,1902.6 3136.03,1891 3194.58,1891 3206.17,1902.6 SW1.A2
RX: ESP32.36 UPSTREAM.2 | length 2769.3
  Top Layer w15: UPSTREAM.2 940,765 1450,765 1953.05,1268.05 2123.63,1268.05 2133.88,1278.3 2133.88,1393.11 1767.21,1759.78 1745.22,1759.78 ESP32.36
TX: DOWNSTREAM.2 ESP32.37 | length 2131.4
  Top Layer w15: ESP32.37 1805,1820 3100,525 DOWNSTREAM.2
USB_VIN: D4.1 J2.2 | length 1802.2
  Top Layer w30: v1(390,885) D4.1
  Top Layer w40: v1(1830,945) J2.2
  Bottom Layer w15: v1@1820,935 v1(1830,945)
  Bottom Layer w40: v1(390,885) 1767.29,885 1825.38,943.09 v1@1826.73,941.73
VDD33: C1.2 C3.2 D1.1 ESP32.2 R1.2 R5.2 | length 8630.7
  Top Layer w15: R1.2@650,1860 R1.2 ; C3.2@839.5,1919.5 835,1915 C3.2@840,1920 ; R5.2 2690,1923.27 v1(2690,2110)
  Top Layer w30: C3.2@839.5,1919.5 C1.2 ; v1(2270,2480) D1.1
  Top Layer w40: v1(490,690) 430,690 35,1085 35,1705 v1(565,2235) ; R1.2@650,1860 v1(650,2060) ; R1.2 680,1830 805,1830 835,1860 C3.2@835,1915 ; C3.2@840,1920 ESP32.2
  Bottom Layer w40: v1(490,690) 2975,690 2980,695 3405,1120 3405,1855 3150,2110 v1(2690,2110) 2320,2480 v1(2270,2480) ; v1(565,2235) 650,2150 v1(650,2060)
pads on no net: DBH.16 ESP32.11 ESP32.41_10 ESP32.41_11 ESP32.41_12 ESP32.41_13 ESP32.41_14 ESP32.41_15 ESP32.41_16 ESP32.41_17 ESP32.41_18 ESP32.41_19 ESP32.41_20 ESP32.41_21 SW1.MH1 SW1.MH2 USB-B.6 USB-B.7

## Polygon pours and split planes (outlines as drawn)
GND on Bottom Layer "GND_L02_P001" (solid, remove dead copper, pour order 1): 0,3510 3510,3510 3510,0 5,0 0,5
GND on Top Layer "GND_L01_P000" (solid, remove dead copper, pour order 0): 0,0 0,3510 3510,3510 3510,0

## Silkscreen, mask and mechanical layers (free items; w line width, h text height)
Top Overlay:
  text "Ella Greetis" at 2265,1535 h100

## Text inside footprints (layer, text, board x,y; h text height)
DBH: Top Overlay "IO47" at 325,2845 h50 r90; Top Overlay "IO46" at 420,2850 h50 r90; Top Overlay "IO45" at 520,2845 h50 r90; Top Overlay "IO42" at 615,2850 h50 r90; Top Overlay "IO41" at 715,2850 h50 r90; Top Overlay "IO40" at 825,2850 h50 r90; Top Overlay "IO39" at 940,2850 h50 r90; Top Overlay "IO38" at 1040,2845 h50 r90; Top Overlay "IO37" at 1120,2840 h50 r90; Top Overlay "IO36" at 1235,2840 h50 r90; Top Overlay "IO35" at 1320,2845 h50 r90; Top Overlay "IO21" at 1420,2850 h50 r90; Top Overlay "IO18" at 1520,2840 h50 r90; Top Overlay "IO17" at 1515,2430 h50 r90; Top Overlay "IO16" at 1415,2430 h50 r90; Top Overlay "IO15" at 1320,2425 h50 r90; Top Overlay "IO14" at 1215,2425 h50 r90; Top Overlay "IO13" at 1105,2425 h50 r90; Top Overlay "IO12" at 1010,2430 h50 r90; Top Overlay "IO11" at 905,2430 h50 r90; Top Overlay "IO10" at 810,2430 h50 r90; Top Overlay "IO9" at 710,2470 h50 r90; Top Overlay "IO8" at 610,2465 h50 r90; Top Overlay "IO7" at 520,2470 h50 r90; Top Overlay "IO6" at 415,2470 h50 r90; Top Overlay "IO5" at 320,2465 h50 r90; Top Overlay "IO4" at 215,2470 h50 r90; Top Overlay "IO3" at 115,2470 h50 r90; Top Overlay "IO48" at 215,2845 h50 r90; Top Overlay "GND" at 120,2840 h50 r90
ESP32: Mechanical 13 "ANTENNA" at 1213.35,2136.93 h50
J?: Mechanical 13 ">PCB EDGE" at 2286.61,15.16 h32